# Altium PCB ME2_LNA.PcbDoc
Units mm, origin at the board's own origin, x right, y up, seen from the top; angles counter-clockwise.
Board outline 41.66 x 29 mm, 2 copper layers (Top Layer, Bottom Layer), stack 0.578 mm thick; 17 components, 9 nets, 41 pads, 50 vias.
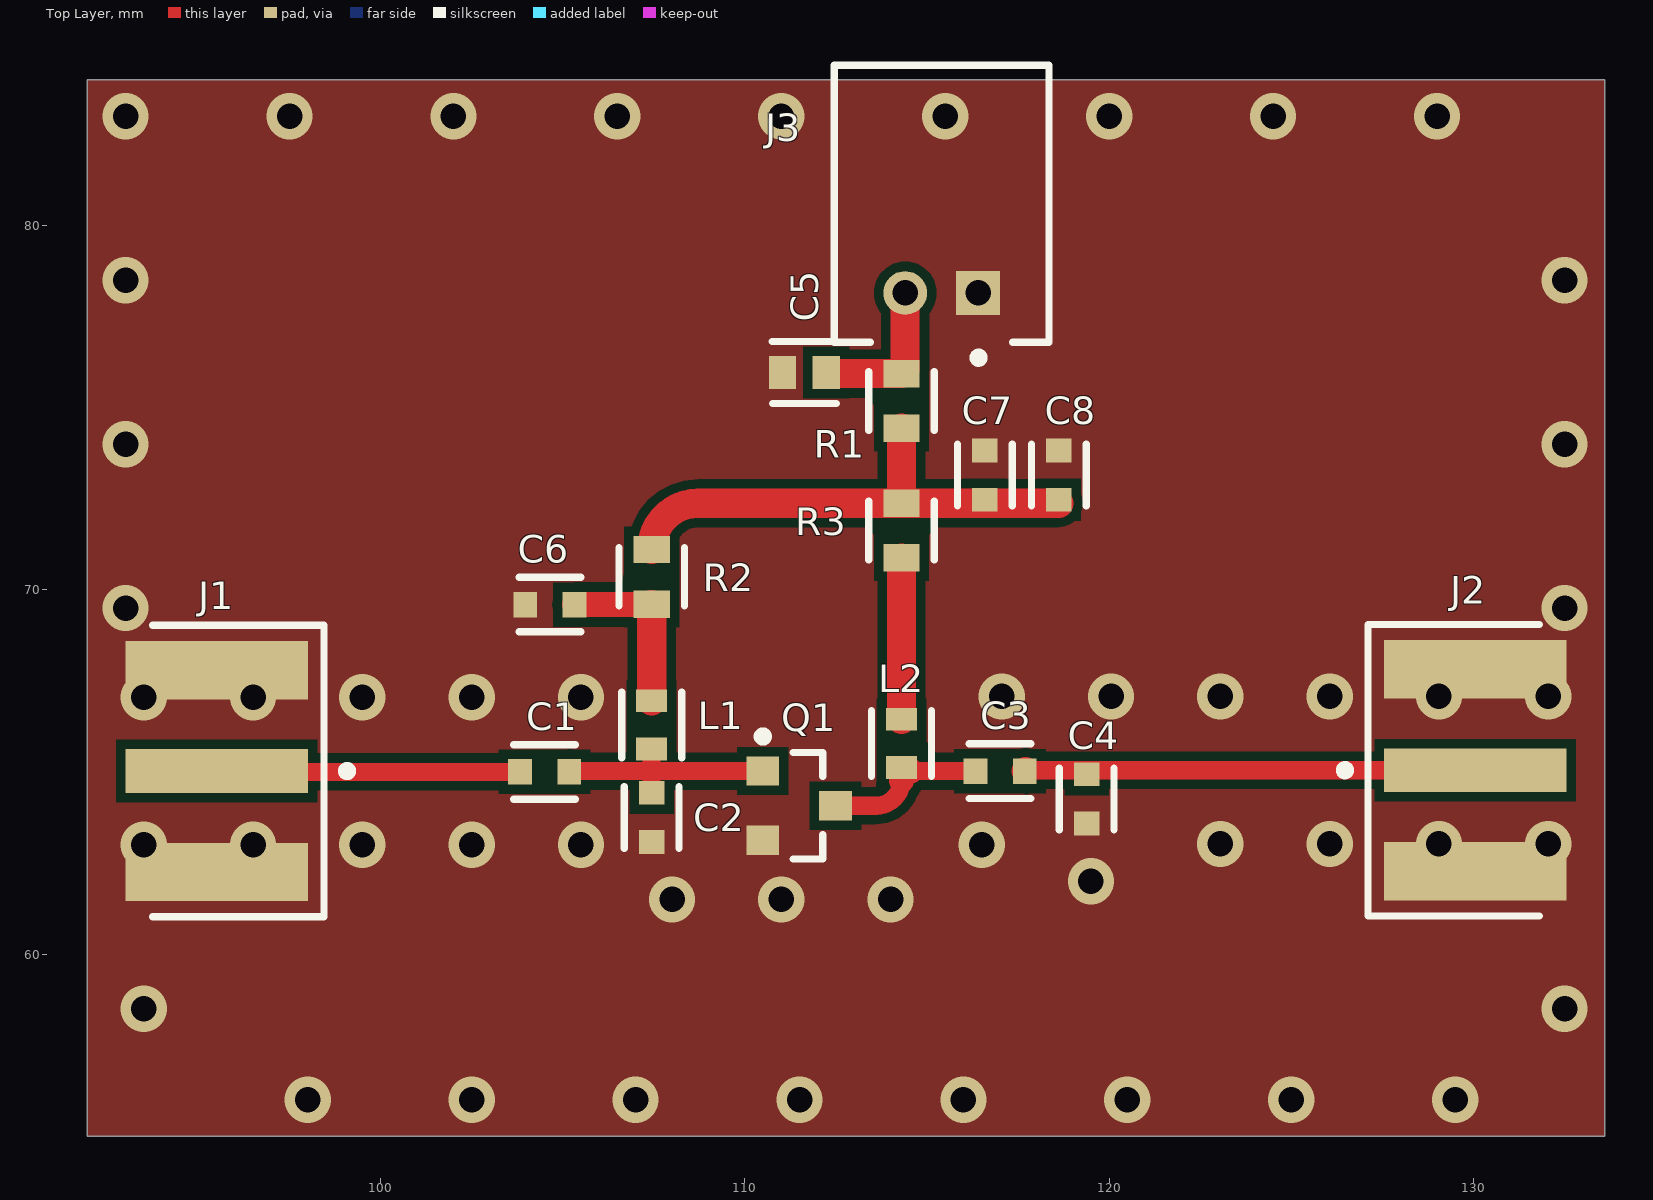
[diagram p0: Top Layer view]
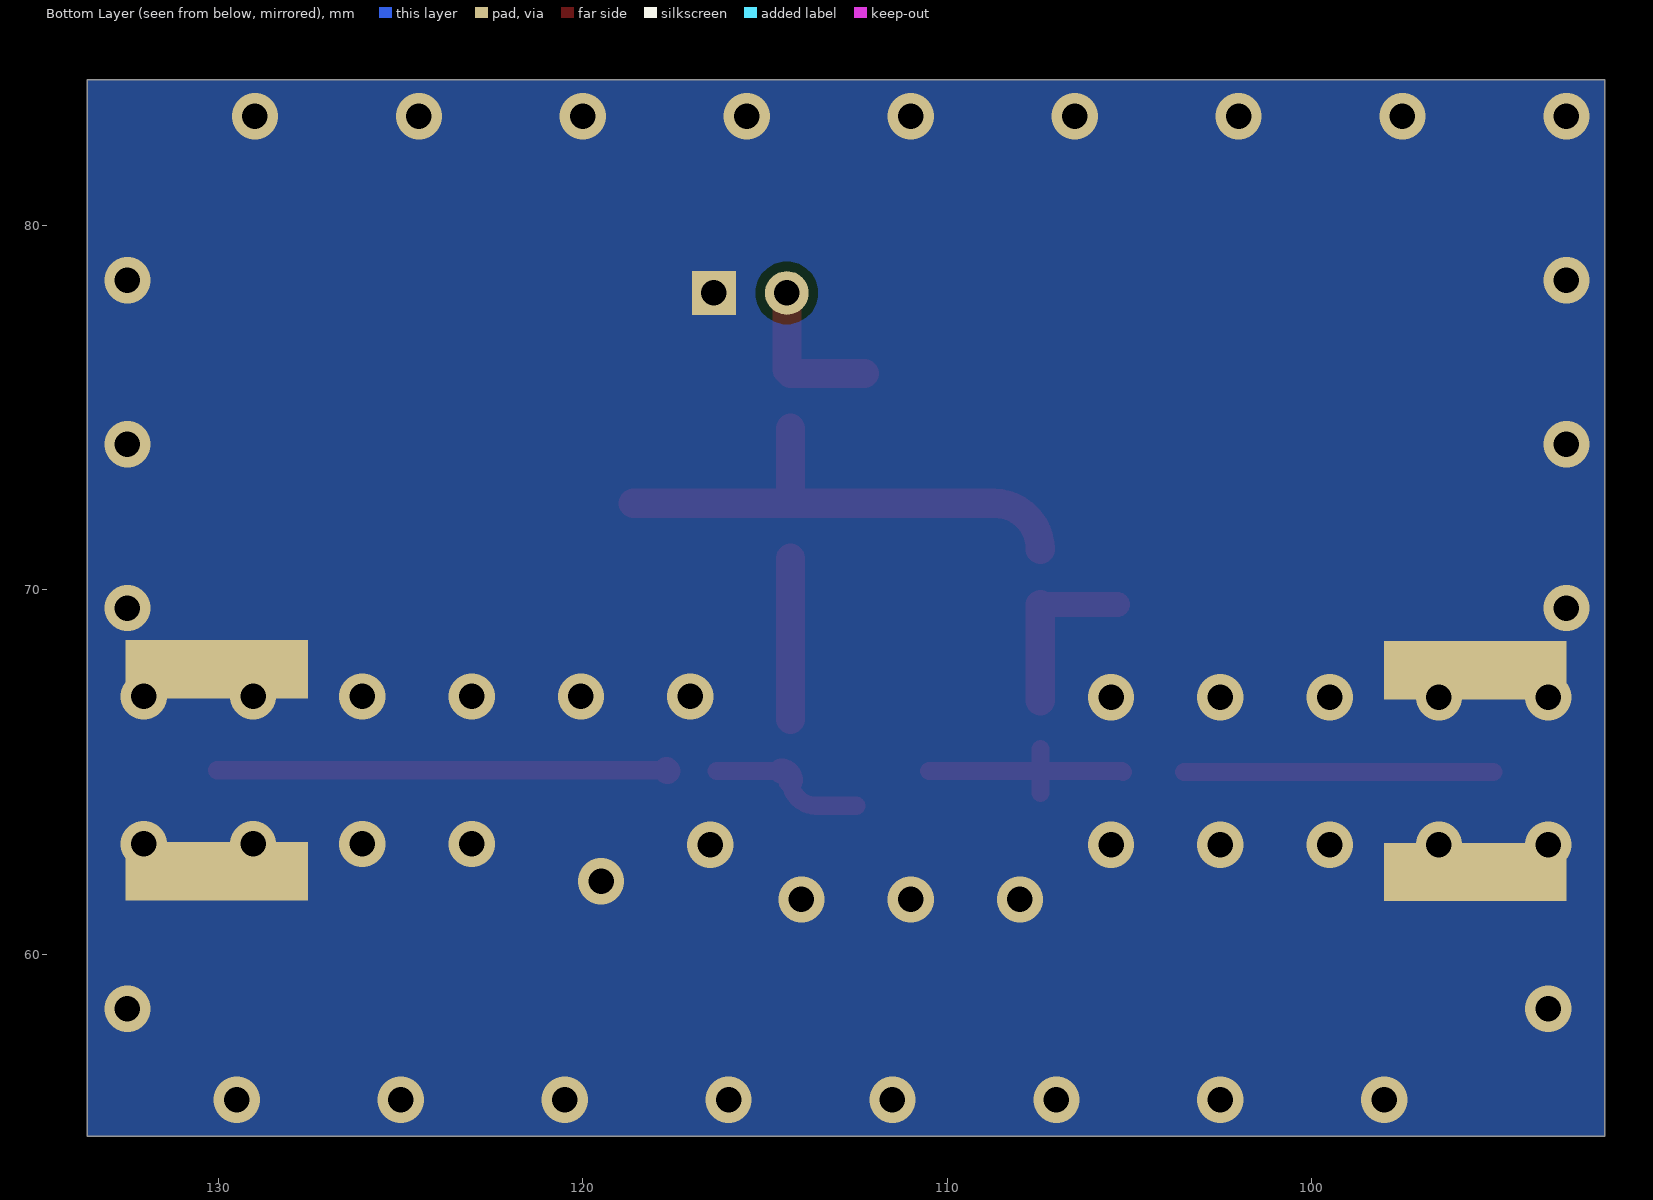
[diagram p1: Bottom Layer view, seen from below]
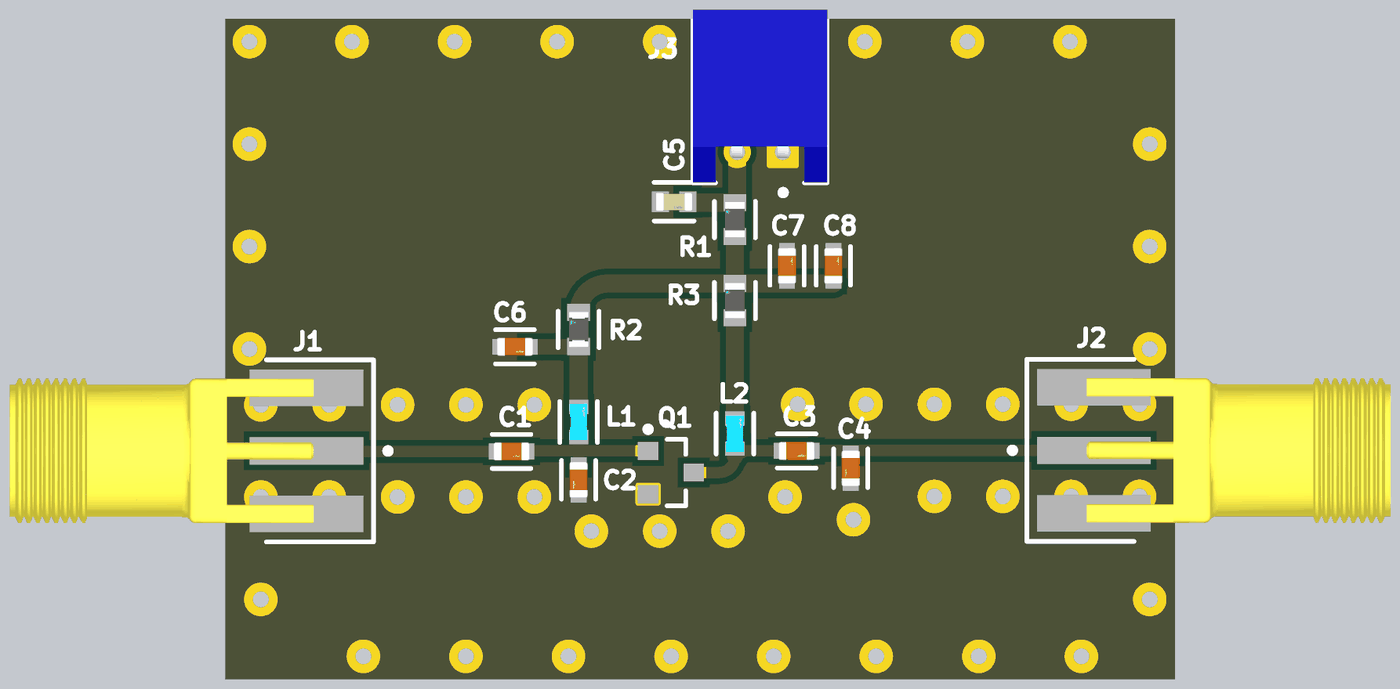
[diagram p2: 3D render of the assembled board from above, using the file's embedded part models]

## Layer stack, top to bottom
Top Layer: signal copper 0.035
Dielectric 1: dielectric 0.508, FR-4, Dk 6.15
Bottom Layer: signal copper 0.035

## Board outline
91.948,55 91.948,84 133.604,84 133.604,55

## Design rules (kind name [scope] priority, off if disabled: settings)
Clearance Clearance_1 [All] p1: gap=0.254 ignorepadtopadclearanceinfootprint=FALSE except(0.25: Arc-Fill Arc-Poly Arc-Region Track-Fill Track-Poly Track-Region Fill-Text Poly-Text Region-Text)
Clearance Clearance_1 [OnMid vs OnMid] p2: gap=0.254 ignorepadtopadclearanceinfootprint=FALSE except(0.25: Arc-Fill Arc-Poly Arc-Region Track-Fill Track-Poly Track-Region Fill-Text Poly-Text Region-Text) sourcerule=40 cellrowname=All cellrowtype=0 cellcolname=All cellcoltype=0 innerlayers=TRUE
Clearance Clearance_2 [(ExistsOnLayer('Top Layer') Or ExistsOnLayer('Bottom Layer')) vs (ExistsOnLayer('Top Layer') Or ExistsOnLayer('Bottom Layer'))] p3: gap=0.254 ignorepadtopadclearanceinfootprint=FALSE except(0.25: Arc-Fill Arc-Poly Arc-Region Track-Fill Track-Poly Track-Region Fill-Text Poly-Text Region-Text) sourcerule=40 cellrowname=All cellrowtype=0 cellcolname=All cellcoltype=0 outerlayers=TRUE
Clearance [All] p4: gap=0.254 ignorepadtopadclearanceinfootprint=FALSE ismatrix=TRUE
PlaneConnect [All] p1: planeconnectstyle=Direct reliefexpansion=0.508 reliefentries=4 reliefconductorwidth=0.254 reliefairgap=0.254
PolygonConnect PolygonConnectStyle_1 [All] p1: connectstyle=Direct reliefconductorwidth=0.254 reliefentries=2 polygonreliefangle="45 Angle" airgapwidth=0.254
PolygonConnect [All] p2: connectstyle=Relief reliefconductorwidth=0.254 reliefentries=4 polygonreliefangle="90 Angle" airgapwidth=0.254
RoutingVias [All] p1: holewidth=0.711 width=1.27 viastyle="Through Hole" minholewidth=0.711 minwidth=1.27 maxholewidth=0.711 maxwidth=1.27
SolderMaskExpansion [All] p1: expansion=0.102 istentingtop=FALSE
Width MaxMinWidth_1 [InNetClass('Matched')] p1: maxlimit=0.691 minlimit=0.691 preferedwidth=0.691 minimp=50.000000 maximp=50.000000 favimp=50.000000
Width MaxMinWidth_2 [All] p2: maxlimit=1.27 minlimit=0.254 preferedwidth=0.254 minimp=50.000000 maximp=50.000000 favimp=50.000000
Width [All] p3: maxlimit=0.254 minlimit=0.254 preferedwidth=0.254
29 further rules are at their usual default settings.

## Classes and differential pairs
component class ME2_LNA: C1 C4 C6 C7 C8 J1 J2 J3 L2 Q1 R1 R2 R3

## Components (designator, comment, footprint, x,y, rotation, side; value= is the part's Value field where it differs from the comment)
C1 "47pF" FP-GCM188-0_1-MFG 104.5,65 r0 top
C2 "3.3pF" FP-GCM188-0_1-MFG 107.442,63.754 r270 top
C3 "8.2pF" FP-GCM188-0_1-MFG 117.007,65.024 r0 top
C4 "1.5pF" FP-GCM188-0_1-MFG 119.38,64.262 r270 top
C5 "10nF" FP-C0603C-CF-MFG 111.633,75.967 r180 top value="10,000 pF"
C6 "220pF" FP-GCM188-0_1-MFG 104.648,69.596 r0 top
C7 "220pF" FP-GCM188-0_1-MFG 116.586,73.152 r90 top
C8 "5.6pF" FP-GCM188-0_1-MFG 118.618,73.152 r90 top
J1 "CON-SMA-EDGE-S" FP-CON-SMA-EDGE-S-MFG 88.244,65.024 r90 top
J2 "CON-SMA-EDGE-S" FP-CON-SMA-EDGE-S-MFG 137.308,65.048 r270 top
J3 "S2B-PH-K-S(LF)(SN)" JST-S2B-PH-K-S_V 115.4,80.6 r180 top
L1 "10nH" FP-LQW18AN_00-MFG 107.442,66.294 r90 top
L2 "8.2nH" FP-LQW18AN_00-MFG 114.3,65.786 r90 top
Q1 "BFU550A" ONSC-SOT-23-3-318-08_V 111.49,64.074 r0 top
R1 "22" FP-CRCW0603-e3-MFG 114.3,75.184 r90 top
R2 "10k" FP-CRCW0603-HPe3-MFG 107.442,70.358 r90 top
R3 "10" FP-CRCW0603-e3-MFG 114.3,71.628 r90 top

## Footprints (in the part's own frame and the unit in brackets; to place one, negate y for a bottom-side part, rotate by r counter-clockwise, add the part's x,y. Pads: shape width x height; smd on the part's side, far side on the other; paste and mask are expansions set on the pad)
FP-C0603C-CF-MFG [mm]
  rect 0.75x0.9 smd paste+0 mask+0: 1(-0.6,0) 2(0.6,0)
  silkscreen extent -0.87,-0.85 0.88,0.85, body extent -1.2,-0.6 1.2,0.6, height 0.25
FP-CON-SMA-EDGE-S-MFG [mm]
  rect 1.2x5 smd paste+0 mask+0: 1(0,-7.26)
  rect 1.6x5 smd paste+0 mask+0: 2(-2.77,-7.26) 3(2.77,-7.26)
  rect 1.6x5 smd far side paste+0 mask+0: 4(-2.77,-7.26) 5(2.77,-7.26)
  silkscreen extent -4,-10.96 4,-5.5, body extent -3.67,-9.86 3.67,4.86, height 0.25
FP-CRCW0603-e3-MFG [mm]
  rect 0.75x1 smd paste+0 mask+0: 1(-0.75,0) 2(0.75,0)
  silkscreen extent -0.8,-0.9 0.8,0.9, body extent -1.22,-0.6 1.22,0.6, height 0.25
FP-CRCW0603-HPe3-MFG [mm]
  rect 0.75x1 smd paste+0 mask+0: 1(-0.75,0) 2(0.75,0)
  silkscreen extent -0.8,-0.9 0.8,0.9, body extent -1.22,-0.6 1.22,0.6, height 0.25
FP-GCM188-0_1-MFG [mm]
  rect 0.65x0.7 smd paste+0 mask+0: 1(-0.675,0) 2(0.675,0)
  silkscreen extent -0.85,-0.75 0.85,0.75, body extent -1.1,-0.55 1.1,0.55, height 0.25
FP-LQW18AN_00-MFG [mm]
  rect 0.625x0.85 smd paste+0 mask+0: 1(-0.663,0) 2(0.663,0)
  silkscreen extent -0.9,-0.82 0.9,0.82, body extent -1.07,-0.6 1.07,0.6, height 0.25
JST-S2B-PH-K-S_V [mm] "THD, 2-Leads, Body 7.6x5.9mm, Pitch 2mm"
  rect 1.2x1.2 hole 0.7: 1(-1,2.45)
  round 1.2 hole 0.7: 2(1,2.45)
  silkscreen extent -2.95,-3.8 2.95,4.35, body extent -2.95,-3.8 2.95,3.8, height 4.8
ONSC-SOT-23-3-318-08_V [mm] "SOT23, 3-Leads, Body 2.92x1.3mm, Pitch 0.95mm"
  rect 0.9x0.8 smd: 1(-1,0.95) 2(-1,-0.95) 3(1,0)
  silkscreen extent -1.12,-1.46 0.65,2.02, body extent -0.65,-1.46 0.65,1.46, height 1.11

## Part data
C1: library part CMP-06035-035791-1, "Ceramic Capacitor for Automotive 47pF  ±1% 100VDC C0G 0603 Paper T/R / GCM1885C2A470FA16D", Case Code (Imperial)=0603, Case Code (Metric)=1608, Max Operating Temperature=125°C, Min Operating Temperature=-55°C, Ratings=AEC-Q200, Tolerance=1%, Voltage Rating=100V, Capacitance=47pF, Case/Package=0603, Mount="Surface Mount", Packaging="Cut Tape"
C2: library part CMP-06035-045493-1, "Ceramic Capacitor for Automotive 3.3pF  ±0.25pF 100VDC C0G 0603 Paper T/R / GCM1885C2A3R3CA16D", Case Code (Imperial)=0603, Case Code (Metric)=1608, Dielectric=C0G, Max Operating Temperature=125°C, Min Operating Temperature=-55°C, Package Quantity=4000, Ratings=AEC-Q200, Voltage Rating=100V, Capacitance=3.3pF, Case/Package=0603, Height=0.8mm, Length=0.063inch, Mount="Surface Mount", Packaging="Tape and Reel", Termination=SMD/SMT, Thickness=0.035inch, Voltage Rating (DC)=100V, Weight=0.000222oz, Width=0.8mm
C3: library part CMP-06035-009251-1, "Ceramic Capacitor for Automotive 8.2pF  ±0.25pF 100VDC C0G 0603 Paper T/R / GCM1885C2A8R2CA16D"
C4: library part CMP-06035-055355-1, "Ceramic Capacitor for Automotive 1.5pF  ±0.25pF 100VDC C0G 0603 Paper T/R / GCM1885C2A1R5CA16D", Case Code (Imperial)=0603, Case Code (Metric)=1608, Dielectric=C0G, Max Operating Temperature=125°C, Min Operating Temperature=-55°C, Package Quantity=4000, Ratings=AEC-Q200, Voltage Rating=100V, Capacitance=1.5pF, Case/Package=0603, Height=0.8mm, Length=0.063inch, Mount="Surface Mount", Packaging="Tape and Reel", Termination=SMD/SMT, Thickness=0.035inch, Voltage Rating (DC)=100V, Weight=0.000222oz, Width=0.8mm
C5: library part CMP-2006-03038-2, "CAP CER 10000PF 200V X7R 0603 / C0603C103K2RACTU", Capacitance="10,000 pF", Manufacturer=KEMET, Manufacturer Part Number=C0603C103K2RACTU, Package=C0603C-CF, Temperature="-55°C to +125°C", Temperature Characteristic=X7R, Temperature Coefficient=30ppm/°C, Temperature Range High=+125°C, Temperature Range Low=-55°C, Tolerance=0.1, Voltage Rating="200 V", Automotive=Yes, Automotive Grade="Grade 1", Category=Cap, ComponentLink2Description=Datasheet, ComponentLink2URL=https://api.kemet.com/component-edge/download/datasheet/C0603C100J5GACAUTO.pdf, Device Class L1="Passive Components", Device Class L2=Capacitors, Device Class L3="Ceramic Capacitors", Digikey Description="CAP CER 10000PF 200V X7R 0603", Height=0.87mm, Lead Free=Yes, Material=Ceramic, Mouser Description="Multilayer Ceramic Capacitors MLCC - SMD/SMT 200volts 10000pF X7R 10%", Octopart=https://octopart.com/c0603c103k2ractu-kemet-1061947, RoHS=TRUE
C6: library part CMP-06035-009189-1, "Ceramic Capacitor for Automotive 220pF  ±1% 100VDC C0G 0603 Paper T/R / GCM1885C2A221FA16D", Case Code (Imperial)=0603, Case Code (Metric)=1608, Max Operating Temperature=125°C, Min Operating Temperature=-55°C, Ratings=AEC-Q200, Tolerance=1%, Voltage Rating=100V, Capacitance=220pF, Case/Package=0603, Mount="Surface Mount", Packaging="Tape and Reel"
C7: library part CMP-06035-009189-1, "Ceramic Capacitor for Automotive 220pF  ±1% 100VDC C0G 0603 Paper T/R / GCM1885C2A221FA16D Murata", Case Code (Imperial)=0603, Case Code (Metric)=1608, Max Operating Temperature=125°C, Min Operating Temperature=-55°C, Ratings=AEC-Q200, Tolerance=1%, Voltage Rating=100V, Capacitance=220pF, Case/Package=0603, Mount="Surface Mount", Packaging="Tape and Reel"
C8: library part CMP-06035-009093-1, "Ceramic Capacitor for Automotive 5.6pF  ±0.25pF 100VDC C0G 0603 Paper T/R / GCM1885C2A5R6CA16D"
J1 J2: library part CMP-204357-000001-1, "CONN SMA JACK STR EDGE MNT", Frequency=18GHz, Manufacturer="RF Solutions Ltd.", Package=CONN_JACK, Automotive=No, Category=Conn, ComponentLink2Description=Datasheet, ComponentLink2URL=https://www.rfsolutions.co.uk/downloads/1498648656DS-CON-EDGE-SMA-4.pdf, Conn Orientation="Right Angle", Contact Material=Gold, Device Class L1=Connectors, Device Class L2="RF / Coaxial Connectors", Device Class L3=unset, Digikey Description="CONN SMA JACK STR EDGE MNT", Footprint Url=https://forum.upverter.com/uploads/default/original/3X/b/e/be75b907af57498775929d6d9099689c472e0307.pdf, Height=6.35mm, Impedance=50Ω, Is Female=yes, Lead Free=Yes, Manufacturer Part Number=CON-SMA-EDGE-S, Number Of Contacts=1, Octopart=https://octopart.com/con-sma-edge-s-rf+solutions-70967450, RoHS=TRUE, Shielding=true
J3: library part CMP-1755-00004-1, "Male Header, Pitch 2 mm, 1 x 2 Position, Height 4.8 mm, Tail Length 3.4 mm, -25 to 85 degC, RoHS, Bulk", Capacitance="10 uF", Case\Package=Radial, Max Operating Temperature="85 degC", Min Operating Temperature="-40 degC", Package Quantity=200, Tolerance=20%, Voltage Rating="50 V", ComponentLink1Description=Datasheet, ComponentLink1URL=http://www.jst-mfg.com/product/pdf/eng/ePH.pdf, DatasheetVersion=Dec-12, Diameter="5 mm", Height="11 mm", Lead Pitch="2 mm", Length="11 mm", Mount="Through Hole", PackageDescription="Male Header, Pitch 2 mm, 1 x 2 Position, Height 4.8 mm, Tail Length 3.4 mm", PackageReference=S2B-PH-K-S, Packaging=Bulk, Pins=2, Radiation Hardening=No, REACH SVHC="No SVHC", RoHSCompliant=true, Voltage Rating (DC)="50 V"
L1: library part CMP-2000-06599-2, "Wire Wound RF Inductor 10nH ±2% 650mA 0.11Ω 0603 (1608) / LQW18AN10NG00D Murata", Case Code (Imperial)=0603, Case Code (Metric)=1608, Current=550mA, Current Rating=650mA, DC Resistance (DCR)=110mR, Inductance Tolerance=2%, Max Operating Temperature=125°C, Min Operating Temperature=-55°C, Package Quantity=4000, Resistor Type=Wirewound, Self Resonant Frequency=6GHz, Test Frequency=100MHz, Case/Package=0603, DC Current=650mA, Depth=1mm, Height=0.8mm, Inductance=10nH, Lead Free="Lead Free", Length=1.6mm, Max DC Current=650mA, Military Standard=Not, Mount="Surface Mount", Number of Pins=2, Packaging="Tape and Reel", Q Factor=35, Radiation Hardening=No, Rated Current-Max=650mA, REACH SVHC="No SVHC", Series=LQW18A_00, Series Resistance=110mR, Shielding=Unshielded, Termination=SMD/SMT, Tolerance=2%, Weight=0.000106oz, Width=0.8mm
L2: library part CMP-06042-007631-1, "Wire Wound RF Inductor 8.2nH ±0.5nH 650mA 0.11Ω 0603 (1608) / LQW18AN8N2D00D Murata", Case Code (Imperial)=0603, Case Code (Metric)=1608, Current Rating=650mA, DC Resistance (DCR)=110mR, Max Operating Temperature=125°C, Min Operating Temperature=-55°C, Package Quantity=4000, Resistor Type=Wirewound, Self Resonant Frequency=6GHz, Test Frequency=100MHz, Case/Package=0603, Core Material=Non-Magnetic, DC Current=650mA, Depth=1mm, Height=0.8mm, Height - Seated (Max)=0.039inch, Inductance=8.2nH, Lead Free="Lead Free", Length=1.6mm, Max DC Current=650mA, Military Standard=Not, Mount="Surface Mount", Packaging="Tape and Reel", Q Factor=35, Radiation Hardening=No, Series Resistance=110mR, Shielding=Unshielded, Termination=SMD/SMT, Weight=0.000106oz, Width=0.031inch
Q1: "BFU550A / NPN wideband silicon RF transistor", Manufacturer="On Semiconductor", PartNumber=MMBTH10LT1G, ComponentLink1Description="Manufacturer URL", ComponentLink1URL=http://www.onsemi.com/, ComponentLink2Description=Datasheet, ComponentLink2URL=http://www.onsemi.cn/pub_link/Collateral/MMBTH10LT1-D.PDF, ComponentLink3Description="Package Specification", ComponentLink3URL=http://www.onsemi.cn/pub_link/Collateral/318-08.PDF, DatasheetVersion="Rev. 5", fT Min (MHz)=650, Mounting Technology="Surface Mount", PackageDescription="3-Pin Small Outline Transistor, Body 2.92 x 1.3 mm, Pitch 0.95 mm", PackageReference=SOT-23-3-318-08, PackageVersion="Rev. AP, 11/2009", Packing="Tape and Reel", Polarity=NPN, RoHS=TRUE
R1: library part CMP-2000-03097-2, "RES Thick Film, 22Ω, 1%, 0.1W, 100ppm/°C, 0603 / CRCW060322R0FKEA Vishay", Case Code (Imperial)=0603, Case Code (Metric)=1608, Max Operating Temperature=155°C, Min Operating Temperature=-55°C, Package Quantity=5000, Power Rating=100mW, Resistance=22R, Temperature Coefficient=100ppm/°C, Tolerance=1%, Voltage Rating=75V, Case/Package=0603, Composition="Thick Film", Contact Plating=Tin, Depth=0.85mm, Height=0.45mm, Lead Free="Lead Free", Length=1.55mm, Military Standard=Not, Mount="Surface Mount", Packaging="Tape and Reel", Radiation Hardening=No, Termination=SMD/SMT, Voltage Rating (DC)=75V, Weight=7.1E-05oz, Width=0.85mm
R2: library part CMP-2000-03835-2, "RES SMD 10K OHM 1% 1/3W 0603 / CRCW060310K0FKEAHP Vishay", Case Code (Imperial)=0603, Case Code (Metric)=1608, Max Operating Temperature=155°C, Max Power Dissipation=250mW, Min Operating Temperature=-55°C, Package Quantity=10, Resistance=10kR, Temperature Coefficient=100ppm/°C, Tolerance=1%, Voltage Rating=75V, Case/Package=0603, Composition="Thick Film", Contact Plating=Tin, Depth=0.85mm, Features="Automotive AEC-Q200", Height=0.45mm, Lead Free="Lead Free", Length=1.6mm, Military Standard=Not, Number of Terminations=2, Packaging="Tape and Reel", Power Rating=250mW, Radiation Hardening=No, Termination=SMD/SMT, Voltage Rating (DC)=75V, Weight=7.1E-05oz, Width=0.033inch
R3: library part CMP-2000-03845-2, "RES Thick Film, 10Ω, 1%, 0.1W, 100ppm/°C, 0603 / CRCW060310R0FKEA Vishay", Case Code (Imperial)=0603, Case Code (Metric)=1608, Max Operating Temperature=155°C, Max Power Dissipation=100mW, Min Operating Temperature=-55°C, Resistance=10R, Temperature Coefficient=100ppm/°C, Tolerance=1%, Voltage Rating=75V, Case/Package=0603, Composition="Thick Film", Contact Plating=Tin, Depth=0.85mm, Features="Automotive AEC-Q200", Height=0.45mm, Lead Free="Lead Free", Length=1.55mm, Military Standard=Not, Mount="Surface Mount", Number of Pins=2, Number of Terminations=2, Package Quantity=10, Packaging="Tape and Reel", Power Rating=100mW, Termination=SMD/SMT, Voltage Rating (DC)=75V, Weight=7.1E-05oz, Width=0.033inch

## Via types
v1: diameter 1.27, hole 0.7, Top Layer to Bottom Layer, 50 vias

## Nets (pads, with @x,y where several pads share a name; then routed paths per layer and width w, separated by ;. In a path a pad name is that pad's centre, name@x,y a point inside that pad or via, vN(x,y) a via of type N, cw(c..) or ccw(c..) an arc to the next point about the centre after c; other vN are vias at no path point)
GND: C2.2 C4.2 C5.2 C6.1 C7.2 C8.2 J1.2 J1.3 J1.4 J1.5 J2.2 J2.3 J2.4 J2.5 J3.1 Q1.2
  other v1: 98,56 102.5,56 107,56 111.5,56 116,56 120.5,56 125,56 129.5,56 93.5,58.5 132.5,58.5 108,61.5 111,61.5 114,61.5 119.5,62 93.5,63 96.5,63 99.5,63 102.5,63 105.5,63 116.5,63 123.052,63.024 126.052,63.024 129.052,63.024 132.052,63.024 93.5,67.048 96.5,67.048 99.5,67.048 102.5,67.048 105.5,67.048 117.052,67.072 120.052,67.072 123.052,67.072 126.052,67.072 129.052,67.072 132.052,67.072 93,69.5 132.5,69.5 93,74 132.5,74 93,78.5 132.5,78.5 93,83 97.5,83 102,83 106.5,83 111,83 115.5,83 120,83 124.5,83 129,83
NetC1_1: C1.1 J1.1 | length 8.5
  Top Layer w0.497: J1.1@95.004,65 C1.1@103.5,65
NetC1_2: C1.2 C2.1 L1.1 Q1.1 | length 6.5
  Top Layer w0.497: C1.2 105.199,65.024 107.442,65.024 ; C2.1 107.442,65.024 ; L1.1 107.442,65.024 ; Q1.1 107.442,65.024
NetC3_1: C3.1 L2.1 Q1.3 | length 4.4
  Top Layer w0.497: Q1.3 113.604,64.074 ccw(c113.604,64.77) 114.3,64.77 ; L2.1@114.554,65.024 C3.1
  Top Layer w0.691: 114.3,64.77 cw(c114.554,64.77) L2.1@114.554,65.024
NetC3_2: C3.2 C4.1 J2.1 | length 12.4
  Top Layer w0.497: C3.2@117.706,65.048 J2.1
  Top Layer w0.715: C3.2 cw(c117.706,65.024) C3.2@117.706,65.048
NetC6_2: C6.2 L1.2 R2.1 | length 4.8
  Top Layer w0.691: C6.2 107.442,69.596 R2.1
  Top Layer w0.8: L1.2 R2.1@107.442,69.596
NetC7_1: C7.1 C8.1 R1.1 R2.2 R3.2 | length 14
  Top Layer w0.8: R2.2 cw(c108.712,71.108) 108.712,72.378 R3.2 ; R1.1 R3.2 ; C8.1@118.618,72.378 R3.2
NetL2_2: L2.2 R3.1 | length 4.4
  Top Layer w0.8: L2.2 R3.1
VCC: C5.1 J3.2 R1.2 | length 4.3
  Top Layer w0.254: R1.2 R1.2@114.4,76.034
  Top Layer w0.8: C5.1@112.266,75.934 R1.2 ; R1.2@114.4,76.034 J3.2

## Polygon pours and split planes (outlines as drawn)
GND on Bottom Layer "GND_L02_P000" (solid, pour order 0): 91.948,84 91.948,55 133.604,55 133.604,84
GND on Top Layer "GND_L01_P002" (solid, pour order 2): 91.948,84 91.948,55 133.604,55 133.604,84

## Silkscreen, mask and mechanical layers (free items; w line width, h text height)
Mechanical 1:
  the board outline again, w0.254